# Altium PCB OPAMP_TESTERh.PcbDoc (part 2 of 2)
Units mm, origin at the board's own origin, x right, y up, seen from the top; angles counter-clockwise.
Board outline 262.64 x 156.72 mm, 2 copper layers (Top Layer, Bottom Layer); 210 components, 0 nets, 1610 pads, 0 vias.
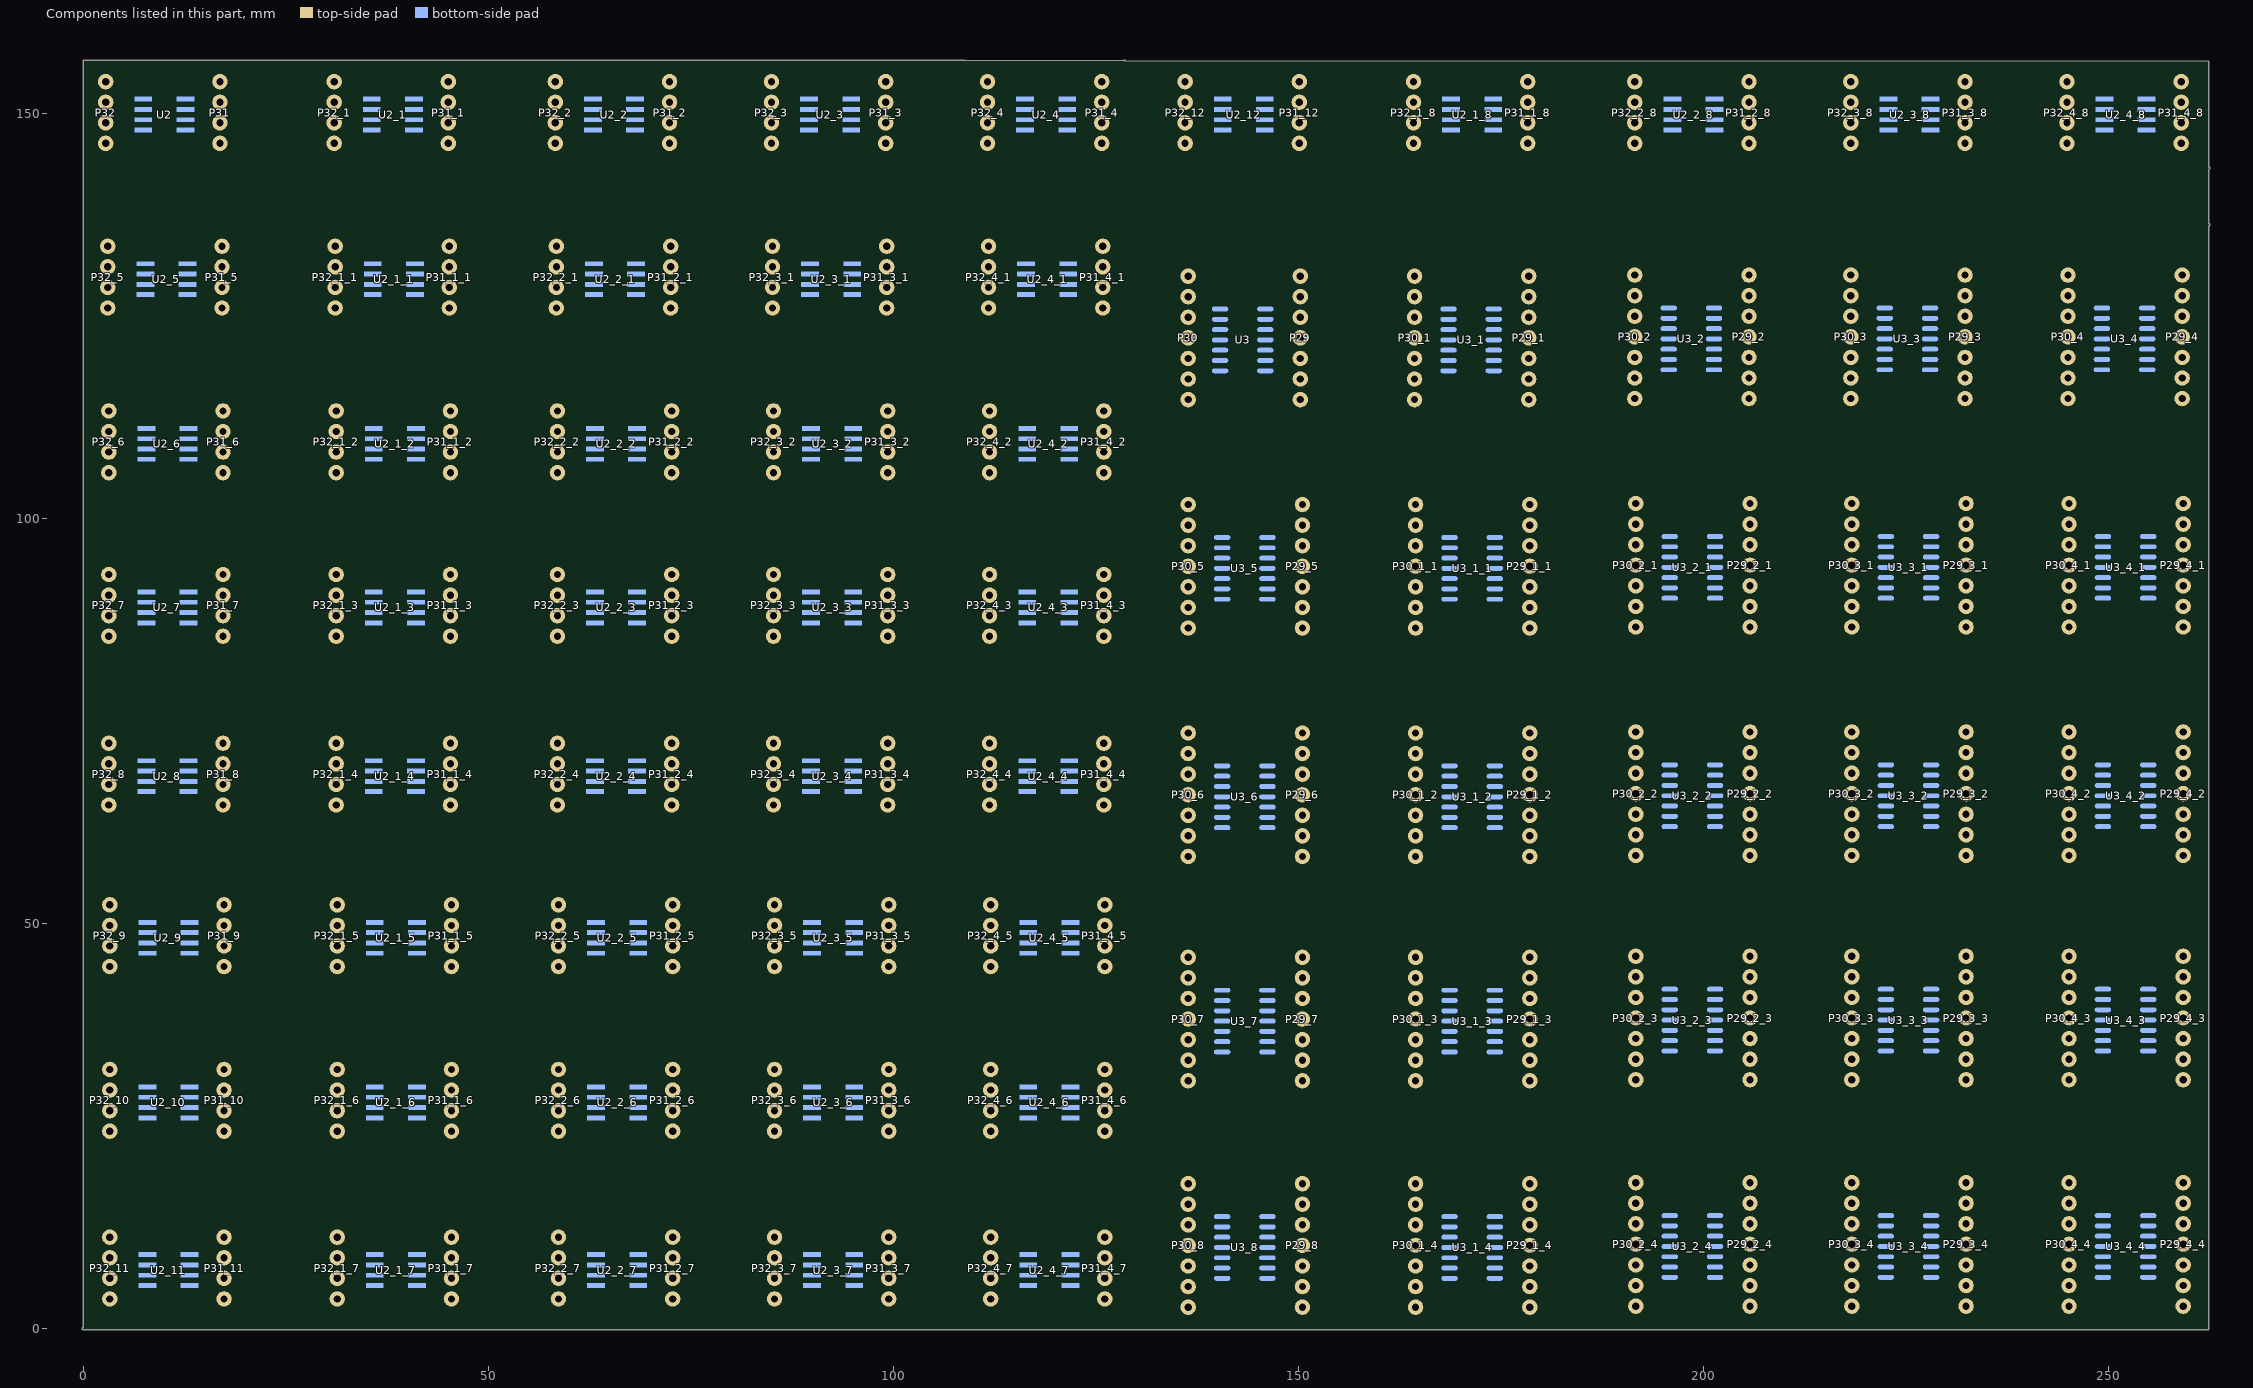
[diagram p2: the components of this part, seen from the top]

## Nets (pads, with @x,y where several pads share a name; then routed paths per layer and width w, separated by ;. In a path a pad name is that pad's centre, name@x,y a point inside that pad or via, vN(x,y) a via of type N, cw(c..) or ccw(c..) an arc to the next point about the centre after c; other vN are vias at no path point) (continued)
copper on no net: | length 3657.5
  Bottom Layer w0.762: 2.794,146.304 4.445,147.955 7.433,147.955 ; 2.794,148.844 3.103,148.844 3.484,149.225 7.433,149.225 ; 2.794,151.384 2.923,151.384 3.812,150.495 7.433,150.495 ; 2.794,153.924 3.013,153.705 3.648,153.705 5.588,151.765 7.433,151.765 ; 3.048,125.984 4.699,127.635 7.687,127.635 ; 3.048,128.524 3.357,128.524 3.738,128.905 7.687,128.905 ; 3.048,131.064 3.177,131.064 4.066,130.175 7.687,130.175 ; 3.048,133.604 3.267,133.385 3.902,133.385 5.842,131.445 7.687,131.445 ; 3.175,64.643 4.826,66.294 7.814,66.294 ; 3.175,67.183 3.484,67.183 3.865,67.564 7.814,67.564 ; 3.175,69.723 3.304,69.723 4.193,68.834 7.814,68.834 ; 3.175,72.263 3.394,72.044 4.029,72.044 5.969,70.104 7.814,70.104 ; 3.175,85.471 4.826,87.122 7.814,87.122 ; 3.175,88.011 3.484,88.011 3.865,88.392 7.814,88.392 ; 3.175,90.551 3.304,90.551 4.193,89.662 7.814,89.662 ; 3.175,93.091 3.394,92.872 4.029,92.872 5.969,90.932 7.814,90.932 ; 3.175,105.664 4.826,107.315 7.814,107.315 ; 3.175,108.204 3.484,108.204 3.865,108.585 7.814,108.585 ; 3.175,110.744 3.304,110.744 4.193,109.855 7.814,109.855 ; 3.175,113.284 3.394,113.065 4.029,113.065 5.969,111.125 7.814,111.125 ; 3.302,3.683 4.953,5.334 7.941,5.334 ; 3.302,6.223 3.611,6.223 3.992,6.604 7.941,6.604 ; 3.302,8.763 3.431,8.763 4.32,7.874 7.941,7.874 ; 3.302,11.303 3.521,11.084 4.156,11.084 6.096,9.144 7.941,9.144 ; 3.302,24.384 4.953,26.035 7.941,26.035 ; 3.302,26.924 3.611,26.924 3.992,27.305 7.941,27.305 ; 3.302,29.464 3.431,29.464 4.32,28.575 7.941,28.575 ; 3.302,32.004 3.521,31.785 4.156,31.785 6.096,29.845 7.941,29.845 ; 3.302,44.704 4.953,46.355 7.941,46.355 ; 3.302,47.244 3.611,47.244 3.992,47.625 7.941,47.625 ; 3.302,49.784 3.431,49.784 4.32,48.895 7.941,48.895 ; 3.302,52.324 3.521,52.105 4.156,52.105 6.096,50.165 7.941,50.165 ; 12.633,147.955 14.859,147.955 16.291,146.523 16.672,146.523 16.891,146.304 ; 12.633,149.225 16.201,149.225 16.582,148.844 16.891,148.844 ; 12.633,150.495 15.693,150.495 16.582,151.384 16.891,151.384 ; 12.633,151.765 14.732,151.765 16.891,153.924 ; 12.887,127.635 15.113,127.635 16.545,126.203 16.926,126.203 17.145,125.984 ; 12.887,128.905 16.455,128.905 16.836,128.524 17.145,128.524 ; 12.887,130.175 15.947,130.175 16.836,131.064 17.145,131.064 ; 12.887,131.445 14.986,131.445 17.145,133.604 ; 13.014,66.294 15.24,66.294 16.672,64.862 17.053,64.862 17.272,64.643 ; 13.014,67.564 16.582,67.564 16.963,67.183 17.272,67.183 ; 13.014,68.834 16.074,68.834 16.963,69.723 17.272,69.723 ; 13.014,70.104 15.113,70.104 17.272,72.263 ; 13.014,87.122 15.24,87.122 16.672,85.69 17.053,85.69 17.272,85.471 ; 13.014,88.392 16.582,88.392 16.963,88.011 17.272,88.011 ; 13.014,89.662 16.074,89.662 16.963,90.551 17.272,90.551 ; 13.014,90.932 15.113,90.932 17.272,93.091 ; 13.014,107.315 15.24,107.315 16.672,105.883 17.053,105.883 17.272,105.664 ; 13.014,108.585 16.582,108.585 16.963,108.204 17.272,108.204 ; 13.014,109.855 16.074,109.855 16.963,110.744 17.272,110.744 ; 13.014,111.125 15.113,111.125 17.272,113.284 ; 13.141,5.334 15.367,5.334 16.799,3.902 17.18,3.902 17.399,3.683 ; 13.141,6.604 16.709,6.604 17.09,6.223 17.399,6.223 ; 13.141,7.874 16.201,7.874 17.09,8.763 17.399,8.763 ; 13.141,9.144 15.24,9.144 17.399,11.303 ; 13.141,26.035 15.367,26.035 16.799,24.603 17.18,24.603 17.399,24.384 ; 13.141,27.305 16.709,27.305 17.09,26.924 17.399,26.924 ; 13.141,28.575 16.201,28.575 17.09,29.464 17.399,29.464 ; 13.141,29.845 15.24,29.845 17.399,32.004 ; 13.141,46.355 15.367,46.355 16.799,44.923 17.18,44.923 17.399,44.704 ; 13.141,47.625 16.709,47.625 17.09,47.244 17.399,47.244 ; 13.141,48.895 16.201,48.895 17.09,49.784 17.399,49.784 ; 13.141,50.165 15.24,50.165 17.399,52.324 ; 30.988,146.304 32.639,147.955 35.627,147.955 ; 30.988,148.844 31.297,148.844 31.678,149.225 35.627,149.225 ; 30.988,151.384 31.117,151.384 32.006,150.495 35.627,150.495 ; 30.988,153.924 31.207,153.705 31.842,153.705 33.782,151.765 35.627,151.765 ; 31.115,125.984 32.766,127.635 35.754,127.635 ; 31.115,128.524 31.424,128.524 31.805,128.905 35.754,128.905 ; 31.115,131.064 31.244,131.064 32.133,130.175 35.754,130.175 ; 31.115,133.604 31.334,133.385 31.969,133.385 33.909,131.445 35.754,131.445 ; 31.242,64.643 32.893,66.294 35.881,66.294 ; 31.242,67.183 31.551,67.183 31.932,67.564 35.881,67.564 ; 31.242,69.723 31.371,69.723 32.26,68.834 35.881,68.834 ; 31.242,72.263 31.461,72.044 32.096,72.044 34.036,70.104 35.881,70.104 ; 31.242,85.471 32.893,87.122 35.881,87.122 ; 31.242,88.011 31.551,88.011 31.932,88.392 35.881,88.392 ; 31.242,90.551 31.371,90.551 32.26,89.662 35.881,89.662 ; 31.242,93.091 31.461,92.872 32.096,92.872 34.036,90.932 35.881,90.932 ; 31.242,105.664 32.893,107.315 35.881,107.315 ; 31.242,108.204 31.551,108.204 31.932,108.585 35.881,108.585 ; 31.242,110.744 31.371,110.744 32.26,109.855 35.881,109.855 ; 31.242,113.284 31.461,113.065 32.096,113.065 34.036,111.125 35.881,111.125 ; 31.369,3.683 33.02,5.334 36.008,5.334 ; 31.369,6.223 31.678,6.223 32.059,6.604 36.008,6.604 ; 31.369,8.763 31.498,8.763 32.387,7.874 36.008,7.874 ; 31.369,11.303 31.588,11.084 32.223,11.084 34.163,9.144 36.008,9.144 ; 31.369,24.384 33.02,26.035 36.008,26.035 ; 31.369,26.924 31.678,26.924 32.059,27.305 36.008,27.305 ; 31.369,29.464 31.498,29.464 32.387,28.575 36.008,28.575 ; 31.369,32.004 31.588,31.785 32.223,31.785 34.163,29.845 36.008,29.845 ; 31.369,44.704 33.02,46.355 36.008,46.355 ; 31.369,47.244 31.678,47.244 32.059,47.625 36.008,47.625 ; 31.369,49.784 31.498,49.784 32.387,48.895 36.008,48.895 ; 31.369,52.324 31.588,52.105 32.223,52.105 34.163,50.165 36.008,50.165 ; 40.827,147.955 43.053,147.955 44.485,146.523 44.866,146.523 45.085,146.304 ; 40.827,149.225 44.395,149.225 44.776,148.844 45.085,148.844 ; 40.827,150.495 43.887,150.495 44.776,151.384 45.085,151.384 ; 40.827,151.765 42.926,151.765 45.085,153.924 ; 40.954,127.635 43.18,127.635 44.612,126.203 44.993,126.203 45.212,125.984 ; 40.954,128.905 44.522,128.905 44.903,128.524 45.212,128.524 ; 40.954,130.175 44.014,130.175 44.903,131.064 45.212,131.064 ; 40.954,131.445 43.053,131.445 45.212,133.604 ; 41.081,66.294 43.307,66.294 44.739,64.862 45.12,64.862 45.339,64.643 ; 41.081,67.564 44.649,67.564 45.03,67.183 45.339,67.183 ; 41.081,68.834 44.141,68.834 45.03,69.723 45.339,69.723 ; 41.081,70.104 43.18,70.104 45.339,72.263 ; 41.081,87.122 43.307,87.122 44.739,85.69 45.12,85.69 45.339,85.471 ; 41.081,88.392 44.649,88.392 45.03,88.011 45.339,88.011 ; 41.081,89.662 44.141,89.662 45.03,90.551 45.339,90.551 ; 41.081,90.932 43.18,90.932 45.339,93.091 ; 41.081,107.315 43.307,107.315 44.739,105.883 45.12,105.883 45.339,105.664 ; 41.081,108.585 44.649,108.585 45.03,108.204 45.339,108.204 ; 41.081,109.855 44.141,109.855 45.03,110.744 45.339,110.744 ; 41.081,111.125 43.18,111.125 45.339,113.284 ; 41.208,5.334 43.434,5.334 44.866,3.902 45.247,3.902 45.466,3.683 ; 41.208,6.604 44.776,6.604 45.157,6.223 45.466,6.223 ; 41.208,7.874 44.268,7.874 45.157,8.763 45.466,8.763 ; 41.208,9.144 43.307,9.144 45.466,11.303 ; 41.208,26.035 43.434,26.035 44.866,24.603 45.247,24.603 45.466,24.384 ; 41.208,27.305 44.776,27.305 45.157,26.924 45.466,26.924 ; 41.208,28.575 44.268,28.575 45.157,29.464 45.466,29.464 ; 41.208,29.845 43.307,29.845 45.466,32.004 ; 41.208,46.355 43.434,46.355 44.866,44.923 45.247,44.923 45.466,44.704 ; 41.208,47.625 44.776,47.625 45.157,47.244 45.466,47.244 ; 41.208,48.895 44.268,48.895 45.157,49.784 45.466,49.784 ; 41.208,50.165 43.307,50.165 45.466,52.324 ; 58.293,146.304 59.944,147.955 62.932,147.955 ; 58.293,148.844 58.602,148.844 58.983,149.225 62.932,149.225 ; 58.293,151.384 58.422,151.384 59.311,150.495 62.932,150.495 ; 58.293,153.924 58.512,153.705 59.147,153.705 61.087,151.765 62.932,151.765 ; 58.42,125.984 60.071,127.635 63.059,127.635 ; 58.42,128.524 58.729,128.524 59.11,128.905 63.059,128.905 ; 58.42,131.064 58.549,131.064 59.438,130.175 63.059,130.175 ; 58.42,133.604 58.639,133.385 59.274,133.385 61.214,131.445 63.059,131.445 ; 58.547,64.643 60.198,66.294 63.186,66.294 ; 58.547,67.183 58.856,67.183 59.237,67.564 63.186,67.564 ; 58.547,69.723 58.676,69.723 59.565,68.834 63.186,68.834 ; 58.547,72.263 58.766,72.044 59.401,72.044 61.341,70.104 63.186,70.104 ; 58.547,85.471 60.198,87.122 63.186,87.122 ; 58.547,88.011 58.856,88.011 59.237,88.392 63.186,88.392 ; 58.547,90.551 58.676,90.551 59.565,89.662 63.186,89.662 ; 58.547,93.091 58.766,92.872 59.401,92.872 61.341,90.932 63.186,90.932 ; 58.547,105.664 60.198,107.315 63.186,107.315 ; 58.547,108.204 58.856,108.204 59.237,108.585 63.186,108.585 ; 58.547,110.744 58.676,110.744 59.565,109.855 63.186,109.855 ; 58.547,113.284 58.766,113.065 59.401,113.065 61.341,111.125 63.186,111.125 ; 58.674,3.683 60.325,5.334 63.313,5.334 ; 58.674,6.223 58.983,6.223 59.364,6.604 63.313,6.604 ; 58.674,8.763 58.803,8.763 59.692,7.874 63.313,7.874 ; 58.674,11.303 58.893,11.084 59.528,11.084 61.468,9.144 63.313,9.144 ; 58.674,24.384 60.325,26.035 63.313,26.035 ; 58.674,26.924 58.983,26.924 59.364,27.305 63.313,27.305 ; 58.674,29.464 58.803,29.464 59.692,28.575 63.313,28.575 ; 58.674,32.004 58.893,31.785 59.528,31.785 61.468,29.845 63.313,29.845 ; 58.674,44.704 60.325,46.355 63.313,46.355 ; 58.674,47.244 58.983,47.244 59.364,47.625 63.313,47.625 ; 58.674,49.784 58.803,49.784 59.692,48.895 63.313,48.895 ; 58.674,52.324 58.893,52.105 59.528,52.105 61.468,50.165 63.313,50.165 ; 68.132,147.955 70.358,147.955 71.79,146.523 72.171,146.523 72.39,146.304 ; 68.132,149.225 71.7,149.225 72.081,148.844 72.39,148.844 ; 68.132,150.495 71.192,150.495 72.081,151.384 72.39,151.384 ; 68.132,151.765 70.231,151.765 72.39,153.924 ; 68.259,127.635 70.485,127.635 71.917,126.203 72.298,126.203 72.517,125.984 ; 68.259,128.905 71.827,128.905 72.208,128.524 72.517,128.524 ; 68.259,130.175 71.319,130.175 72.208,131.064 72.517,131.064 ; 68.259,131.445 70.358,131.445 72.517,133.604 ; 68.386,66.294 70.612,66.294 72.044,64.862 72.425,64.862 72.644,64.643 ; 68.386,67.564 71.954,67.564 72.335,67.183 72.644,67.183 ; 68.386,68.834 71.446,68.834 72.335,69.723 72.644,69.723 ; 68.386,70.104 70.485,70.104 72.644,72.263 ; 68.386,87.122 70.612,87.122 72.044,85.69 72.425,85.69 72.644,85.471 ; 68.386,88.392 71.954,88.392 72.335,88.011 72.644,88.011 ; 68.386,89.662 71.446,89.662 72.335,90.551 72.644,90.551 ; 68.386,90.932 70.485,90.932 72.644,93.091 ; 68.386,107.315 70.612,107.315 72.044,105.883 72.425,105.883 72.644,105.664 ; 68.386,108.585 71.954,108.585 72.335,108.204 72.644,108.204 ; 68.386,109.855 71.446,109.855 72.335,110.744 72.644,110.744 ; 68.386,111.125 70.485,111.125 72.644,113.284 ; 68.513,5.334 70.739,5.334 72.171,3.902 72.552,3.902 72.771,3.683 ; 68.513,6.604 72.081,6.604 72.462,6.223 72.771,6.223 ; 68.513,7.874 71.573,7.874 72.462,8.763 72.771,8.763 ; 68.513,9.144 70.612,9.144 72.771,11.303 ; 68.513,26.035 70.739,26.035 72.171,24.603 72.552,24.603 72.771,24.384 ; 68.513,27.305 72.081,27.305 72.462,26.924 72.771,26.924 ; 68.513,28.575 71.573,28.575 72.462,29.464 72.771,29.464 ; 68.513,29.845 70.612,29.845 72.771,32.004 ; 68.513,46.355 70.739,46.355 72.171,44.923 72.552,44.923 72.771,44.704 ; 68.513,47.625 72.081,47.625 72.462,47.244 72.771,47.244 ; 68.513,48.895 71.573,48.895 72.462,49.784 72.771,49.784 ; 68.513,50.165 70.612,50.165 72.771,52.324 ; 84.963,146.304 86.614,147.955 89.602,147.955 ; 84.963,148.844 85.272,148.844 85.653,149.225 89.602,149.225 ; 84.963,151.384 85.092,151.384 85.981,150.495 89.602,150.495 ; 84.963,153.924 85.182,153.705 85.817,153.705 87.757,151.765 89.602,151.765 ; 85.09,125.984 86.741,127.635 89.729,127.635 ; 85.09,128.524 85.399,128.524 85.78,128.905 89.729,128.905 ; 85.09,131.064 85.219,131.064 86.108,130.175 89.729,130.175 ; 85.09,133.604 85.309,133.385 85.944,133.385 87.884,131.445 89.729,131.445 ; 85.217,64.643 86.868,66.294 89.856,66.294 ; 85.217,67.183 85.526,67.183 85.907,67.564 89.856,67.564 ; 85.217,69.723 85.346,69.723 86.235,68.834 89.856,68.834 ; 85.217,72.263 85.436,72.044 86.071,72.044 88.011,70.104 89.856,70.104 ; 85.217,85.471 86.868,87.122 89.856,87.122 ; 85.217,88.011 85.526,88.011 85.907,88.392 89.856,88.392 ; 85.217,90.551 85.346,90.551 86.235,89.662 89.856,89.662 ; 85.217,93.091 85.436,92.872 86.071,92.872 88.011,90.932 89.856,90.932 ; 85.217,105.664 86.868,107.315 89.856,107.315 ; 85.217,108.204 85.526,108.204 85.907,108.585 89.856,108.585 ; 85.217,110.744 85.346,110.744 86.235,109.855 89.856,109.855 ; 85.217,113.284 85.436,113.065 86.071,113.065 88.011,111.125 89.856,111.125 ; 85.344,3.683 86.995,5.334 89.983,5.334 ; 85.344,6.223 85.653,6.223 86.034,6.604 89.983,6.604 ; 85.344,8.763 85.473,8.763 86.362,7.874 89.983,7.874 ; 85.344,11.303 85.563,11.084 86.198,11.084 88.138,9.144 89.983,9.144 ; 85.344,24.384 86.995,26.035 89.983,26.035 ; 85.344,26.924 85.653,26.924 86.034,27.305 89.983,27.305 ; 85.344,29.464 85.473,29.464 86.362,28.575 89.983,28.575 ; 85.344,32.004 85.563,31.785 86.198,31.785 88.138,29.845 89.983,29.845 ; 85.344,44.704 86.995,46.355 89.983,46.355 ; 85.344,47.244 85.653,47.244 86.034,47.625 89.983,47.625 ; 85.344,49.784 85.473,49.784 86.362,48.895 89.983,48.895 ; 85.344,52.324 85.563,52.105 86.198,52.105 88.138,50.165 89.983,50.165 ; 94.802,147.955 97.028,147.955 98.46,146.523 98.841,146.523 99.06,146.304 ; 94.802,149.225 98.37,149.225 98.751,148.844 99.06,148.844 ; 94.802,150.495 97.862,150.495 98.751,151.384 99.06,151.384 ; 94.802,151.765 96.901,151.765 99.06,153.924 ; 94.929,127.635 97.155,127.635 98.587,126.203 98.968,126.203 99.187,125.984 ; 94.929,128.905 98.497,128.905 98.878,128.524 99.187,128.524 ; 94.929,130.175 97.989,130.175 98.878,131.064 99.187,131.064 ; 94.929,131.445 97.028,131.445 99.187,133.604 ; 95.056,66.294 97.282,66.294 98.714,64.862 99.095,64.862 99.314,64.643 ; 95.056,67.564 98.624,67.564 99.005,67.183 99.314,67.183 ; 95.056,68.834 98.116,68.834 99.005,69.723 99.314,69.723 ; 95.056,70.104 97.155,70.104 99.314,72.263 ; 95.056,87.122 97.282,87.122 98.714,85.69 99.095,85.69 99.314,85.471 ; 95.056,88.392 98.624,88.392 99.005,88.011 99.314,88.011 ; 95.056,89.662 98.116,89.662 99.005,90.551 99.314,90.551 ; 95.056,90.932 97.155,90.932 99.314,93.091 ; 95.056,107.315 97.282,107.315 98.714,105.883 99.095,105.883 99.314,105.664 ; 95.056,108.585 98.624,108.585 99.005,108.204 99.314,108.204 ; 95.056,109.855 98.116,109.855 99.005,110.744 99.314,110.744 ; 95.056,111.125 97.155,111.125 99.314,113.284 ; 95.183,5.334 97.409,5.334 98.841,3.902 99.222,3.902 99.441,3.683 ; 95.183,6.604 98.751,6.604 99.132,6.223 99.441,6.223 ; 95.183,7.874 98.243,7.874 99.132,8.763 99.441,8.763 ; 95.183,9.144 97.282,9.144 99.441,11.303 ; 95.183,26.035 97.409,26.035 98.841,24.603 99.222,24.603 99.441,24.384 ; 95.183,27.305 98.751,27.305 99.132,26.924 99.441,26.924 ; 95.183,28.575 98.243,28.575 99.132,29.464 99.441,29.464 ; 95.183,29.845 97.282,29.845 99.441,32.004 ; 95.183,46.355 97.409,46.355 98.841,44.923 99.222,44.923 99.441,44.704 ; 95.183,47.625 98.751,47.625 99.132,47.244 99.441,47.244 ; 95.183,48.895 98.243,48.895 99.132,49.784 99.441,49.784 ; 95.183,50.165 97.282,50.165 99.441,52.324 ; 111.633,146.304 113.284,147.955 116.272,147.955 ; 111.633,148.844 111.942,148.844 112.323,149.225 116.272,149.225 ; 111.633,151.384 111.762,151.384 112.651,150.495 116.272,150.495 ; 111.633,153.924 111.852,153.705 112.487,153.705 114.427,151.765 116.272,151.765 ; 111.76,125.984 113.411,127.635 116.399,127.635 ; 111.76,128.524 112.069,128.524 112.45,128.905 116.399,128.905 ; 111.76,131.064 111.889,131.064 112.778,130.175 116.399,130.175 ; 111.76,133.604 111.979,133.385 112.614,133.385 114.554,131.445 116.399,131.445 ; 111.887,64.643 113.538,66.294 116.526,66.294 ; 111.887,67.183 112.196,67.183 112.577,67.564 116.526,67.564 ; 111.887,69.723 112.016,69.723 112.905,68.834 116.526,68.834 ; 111.887,72.263 112.106,72.044 112.741,72.044 114.681,70.104 116.526,70.104 ; 111.887,85.471 113.538,87.122 116.526,87.122 ; 111.887,88.011 112.196,88.011 112.577,88.392 116.526,88.392 ; 111.887,90.551 112.016,90.551 112.905,89.662 116.526,89.662 ; 111.887,93.091 112.106,92.872 112.741,92.872 114.681,90.932 116.526,90.932 ; 111.887,105.664 113.538,107.315 116.526,107.315 ; 111.887,108.204 112.196,108.204 112.577,108.585 116.526,108.585 ; 111.887,110.744 112.016,110.744 112.905,109.855 116.526,109.855 ; 111.887,113.284 112.106,113.065 112.741,113.065 114.681,111.125 116.526,111.125 ; 112.014,3.683 113.665,5.334 116.653,5.334 ; 112.014,6.223 112.323,6.223 112.704,6.604 116.653,6.604 ; 112.014,8.763 112.143,8.763 113.032,7.874 116.653,7.874 ; 112.014,11.303 112.233,11.084 112.868,11.084 114.808,9.144 116.653,9.144 ; 112.014,24.384 113.665,26.035 116.653,26.035 ; 112.014,26.924 112.323,26.924 112.704,27.305 116.653,27.305 ; 112.014,29.464 112.143,29.464 113.032,28.575 116.653,28.575 ; 112.014,32.004 112.233,31.785 112.868,31.785 114.808,29.845 116.653,29.845 ; 112.014,44.704 113.665,46.355 116.653,46.355 ; 112.014,47.244 112.323,47.244 112.704,47.625 116.653,47.625 ; 112.014,49.784 112.143,49.784 113.032,48.895 116.653,48.895 ; 112.014,52.324 112.233,52.105 112.868,52.105 114.808,50.165 116.653,50.165 ; 121.472,147.955 123.698,147.955 125.13,146.523 125.511,146.523 125.73,146.304 ; 121.472,149.225 125.04,149.225 125.421,148.844 125.73,148.844 ; 121.472,150.495 124.532,150.495 125.421,151.384 125.73,151.384 ; 121.472,151.765 123.571,151.765 125.73,153.924 ; 121.599,127.635 123.825,127.635 125.257,126.203 125.638,126.203 125.857,125.984 ; 121.599,128.905 125.167,128.905 125.548,128.524 125.857,128.524 ; 121.599,130.175 124.659,130.175 125.548,131.064 125.857,131.064 ; 121.599,131.445 123.698,131.445 125.857,133.604 ; 121.726,66.294 123.952,66.294 125.384,64.862 125.765,64.862 125.984,64.643 ; 121.726,67.564 125.294,67.564 125.675,67.183 125.984,67.183 ; 121.726,68.834 124.786,68.834 125.675,69.723 125.984,69.723 ; 121.726,70.104 123.825,70.104 125.984,72.263 ; 121.726,87.122 123.952,87.122 125.384,85.69 125.765,85.69 125.984,85.471 ; 121.726,88.392 125.294,88.392 125.675,88.011 125.984,88.011 ; 121.726,89.662 124.786,89.662 125.675,90.551 125.984,90.551 ; 121.726,90.932 123.825,90.932 125.984,93.091 ; 121.726,107.315 123.952,107.315 125.384,105.883 125.765,105.883 125.984,105.664 ; 121.726,108.585 125.294,108.585 125.675,108.204 125.984,108.204 ; 121.726,109.855 124.786,109.855 125.675,110.744 125.984,110.744 ; 121.726,111.125 123.825,111.125 125.984,113.284 ; 121.853,5.334 124.079,5.334 125.511,3.902 125.892,3.902 126.111,3.683 ; 121.853,6.604 125.421,6.604 125.802,6.223 126.111,6.223 ; 121.853,7.874 124.913,7.874 125.802,8.763 126.111,8.763 ; 121.853,9.144 123.952,9.144 126.111,11.303 ; 121.853,26.035 124.079,26.035 125.511,24.603 125.892,24.603 126.111,24.384 ; 121.853,27.305 125.421,27.305 125.802,26.924 126.111,26.924 ; 121.853,28.575 124.913,28.575 125.802,29.464 126.111,29.464 ; 121.853,29.845 123.952,29.845 126.111,32.004 ; 121.853,46.355 124.079,46.355 125.511,44.923 125.892,44.923 126.111,44.704 ; 121.853,47.625 125.421,47.625 125.802,47.244 126.111,47.244 ; 121.853,48.895 124.913,48.895 125.802,49.784 126.111,49.784 ; 121.853,50.165 123.952,50.165 126.111,52.324 ; 136.017,146.304 137.668,147.955 140.656,147.955 ; 136.017,148.844 136.326,148.844 136.707,149.225 140.656,149.225 ; 136.017,151.384 136.146,151.384 137.035,150.495 140.656,150.495 ; 136.017,153.924 136.236,153.705 136.871,153.705 138.811,151.765 140.656,151.765 ; 136.144,114.681 136.22,114.681 139.776,118.237 140.335,118.237 ; 136.144,117.221 138.354,119.431 140.259,119.431 140.335,119.507 ; 136.144,119.761 136.453,119.761 137.469,120.777 140.335,120.777 ; 136.144,122.301 138.239,122.301 138.494,122.047 140.335,122.047 ; 136.144,124.841 136.212,124.841 137.736,123.317 140.335,123.317 ; 136.144,127.381 138.962,124.563 140.311,124.563 ; 136.144,129.921 138.303,129.921 140.335,127.889 140.335,125.857 ; 136.398,2.667 136.474,2.667 140.03,6.223 140.589,6.223 ; 136.398,5.207 138.608,7.417 140.513,7.417 140.589,7.493 ; 136.398,7.747 136.707,7.747 137.723,8.763 140.589,8.763 ; 136.398,10.287 138.493,10.287 138.748,10.033 140.589,10.033 ; 136.398,12.827 136.466,12.827 137.99,11.303 140.589,11.303 ; 136.398,15.367 139.216,12.549 140.565,12.549 ; 136.398,17.907 138.557,17.907 140.589,15.875 140.589,13.843 ; 136.398,30.607 136.474,30.607 140.03,34.163 140.589,34.163 ; 136.398,33.147 138.608,35.357 140.513,35.357 140.589,35.433 ; 136.398,35.687 136.707,35.687 137.723,36.703 140.589,36.703 ; 136.398,38.227 138.493,38.227 138.748,37.973 140.589,37.973 ; 136.398,40.767 136.466,40.767 137.99,39.243 140.589,39.243 ; 136.398,43.307 139.216,40.489 140.565,40.489 ; 136.398,45.847 138.557,45.847 140.589,43.815 140.589,41.783 ; 136.398,58.293 136.474,58.293 140.03,61.849 140.589,61.849 ; 136.398,60.833 138.608,63.043 140.513,63.043 140.589,63.119 ; 136.398,63.373 136.707,63.373 137.723,64.389 140.589,64.389 ; 136.398,65.913 138.493,65.913 138.748,65.659 140.589,65.659 ; 136.398,68.453 136.466,68.453 137.99,66.929 140.589,66.929 ; 136.398,70.993 139.216,68.175 140.565,68.175 ; 136.398,73.533 138.557,73.533 140.589,71.501 140.589,69.469 ; 136.398,86.487 136.474,86.487 140.03,90.043 140.589,90.043 ; 136.398,89.027 138.608,91.237 140.513,91.237 140.589,91.313 ; 136.398,91.567 136.707,91.567 137.723,92.583 140.589,92.583 ; 136.398,94.107 138.493,94.107 138.748,93.853 140.589,93.853 ; 136.398,96.647 136.466,96.647 137.99,95.123 140.589,95.123 ; 136.398,99.187 139.216,96.369 140.565,96.369 ; 136.398,101.727 138.557,101.727 140.589,99.695 140.589,97.663 ; 145.856,147.955 148.082,147.955 149.514,146.523 149.895,146.523 150.114,146.304 ; 145.856,149.225 149.424,149.225 149.805,148.844 150.114,148.844 ; 145.856,150.495 148.916,150.495 149.805,151.384 150.114,151.384 ; 145.856,151.765 147.955,151.765 150.114,153.924 ; 145.923,118.237 146.685,118.237 150.241,114.681 ; 145.923,119.473 147.989,119.473 150.241,117.221 ; 145.923,120.777 148.916,120.777 149.932,119.761 150.241,119.761 ; 145.923,122.066 149.696,122.066 149.932,122.301 150.241,122.301 ; 145.923,123.317 148.649,123.317 150.173,124.841 150.241,124.841 ; 145.923,125.857 145.923,127.762 148.082,129.921 150.241,129.921 ; 145.926,124.59 147.45,124.59 150.241,127.381 ; 146.177,6.223 146.939,6.223 150.495,2.667 ; 146.177,7.459 148.243,7.459 150.495,5.207 ; 146.177,8.763 149.17,8.763 150.186,7.747 150.495,7.747 ; 146.177,10.052 149.95,10.052 150.186,10.287 150.495,10.287 ; 146.177,11.303 148.903,11.303 150.427,12.827 150.495,12.827 ; 146.177,13.843 146.177,15.748 148.336,17.907 150.495,17.907 ; 146.177,34.163 146.939,34.163 150.495,30.607 ; 146.177,35.399 148.243,35.399 150.495,33.147 ; 146.177,36.703 149.17,36.703 150.186,35.687 150.495,35.687 ; 146.177,37.992 149.95,37.992 150.186,38.227 150.495,38.227 ; 146.177,39.243 148.903,39.243 150.427,40.767 150.495,40.767 ; 146.177,41.783 146.177,43.688 148.336,45.847 150.495,45.847 ; 146.177,61.849 146.939,61.849 150.495,58.293 ; 146.177,63.085 148.243,63.085 150.495,60.833 ; 146.177,64.389 149.17,64.389 150.186,63.373 150.495,63.373 ; 146.177,65.678 149.95,65.678 150.186,65.913 150.495,65.913 ; 146.177,66.929 148.903,66.929 150.427,68.453 150.495,68.453 ; 146.177,69.469 146.177,71.374 148.336,73.533 150.495,73.533 ; 146.177,90.043 146.939,90.043 150.495,86.487 ; 146.177,91.279 148.243,91.279 150.495,89.027 ; 146.177,92.583 149.17,92.583 150.186,91.567 150.495,91.567 ; 146.177,93.872 149.95,93.872 150.186,94.107 150.495,94.107 ; 146.177,95.123 148.903,95.123 150.427,96.647 150.495,96.647 ; 146.177,97.663 146.177,99.568 148.336,101.727 150.495,101.727 ; 146.18,12.576 147.704,12.576 150.495,15.367 ; 146.18,40.516 147.704,40.516 150.495,43.307 ; 146.18,68.202 147.704,68.202 150.495,70.993 ; 146.18,96.396 147.704,96.396 150.495,99.187 ; 164.211,146.304 165.862,147.955 168.85,147.955 ; 164.211,148.844 164.52,148.844 164.901,149.225 168.85,149.225 ; 164.211,151.384 164.34,151.384 165.229,150.495 168.85,150.495 ; 164.211,153.924 164.43,153.705 165.065,153.705 167.005,151.765 168.85,151.765 ; 164.338,114.681 164.414,114.681 167.97,118.237 168.529,118.237 ; 164.338,117.221 166.548,119.431 168.453,119.431 168.529,119.507 ; 164.338,119.761 164.647,119.761 165.663,120.777 168.529,120.777 ; 164.338,122.301 166.433,122.301 166.688,122.047 168.529,122.047 ; 164.338,124.841 164.406,124.841 165.93,123.317 168.529,123.317 ; 164.338,127.381 167.156,124.563 168.505,124.563 ; 164.338,129.921 166.497,129.921 168.529,127.889 168.529,125.857 ; 164.465,2.667 164.541,2.667 168.097,6.223 168.656,6.223 ; 164.465,5.207 166.675,7.417 168.58,7.417 168.656,7.493 ; 164.465,7.747 164.774,7.747 165.79,8.763 168.656,8.763 ; 164.465,10.287 166.56,10.287 166.815,10.033 168.656,10.033 ; 164.465,12.827 164.533,12.827 166.057,11.303 168.656,11.303 ; 164.465,15.367 167.283,12.549 168.632,12.549 ; 164.465,17.907 166.624,17.907 168.656,15.875 168.656,13.843 ; 164.465,30.607 164.541,30.607 168.097,34.163 168.656,34.163 ; 164.465,33.147 166.675,35.357 168.58,35.357 168.656,35.433 ; 164.465,35.687 164.774,35.687 165.79,36.703 168.656,36.703 ; 164.465,38.227 166.56,38.227 166.815,37.973 168.656,37.973 ; 164.465,40.767 164.533,40.767 166.057,39.243 168.656,39.243 ; 164.465,43.307 167.283,40.489 168.632,40.489 ; 164.465,45.847 166.624,45.847 168.656,43.815 168.656,41.783 ; 164.465,58.293 164.541,58.293 168.097,61.849 168.656,61.849 ; 164.465,60.833 166.675,63.043 168.58,63.043 168.656,63.119 ; 164.465,63.373 164.774,63.373 165.79,64.389 168.656,64.389 ; 164.465,65.913 166.56,65.913 166.815,65.659 168.656,65.659 ; 164.465,68.453 164.533,68.453 166.057,66.929 168.656,66.929 ; 164.465,70.993 167.283,68.175 168.632,68.175 ; 164.465,73.533 166.624,73.533 168.656,71.501 168.656,69.469 ; 164.465,86.487 164.541,86.487 168.097,90.043 168.656,90.043 ; 164.465,89.027 166.675,91.237 168.58,91.237 168.656,91.313 ; 164.465,91.567 164.774,91.567 165.79,92.583 168.656,92.583 ; 164.465,94.107 166.56,94.107 166.815,93.853 168.656,93.853 ; 164.465,96.647 164.533,96.647 166.057,95.123 168.656,95.123 ; 164.465,99.187 167.283,96.369 168.632,96.369 ; 164.465,101.727 166.624,101.727 168.656,99.695 168.656,97.663 ; 174.05,147.955 176.276,147.955 177.708,146.523 178.089,146.523 178.308,146.304 ; 174.05,149.225 177.618,149.225 177.999,148.844 178.308,148.844 ; 174.05,150.495 177.11,150.495 177.999,151.384 178.308,151.384 ; 174.05,151.765 176.149,151.765 178.308,153.924 ; 174.117,118.237 174.879,118.237 178.435,114.681 ; 174.117,119.473 176.183,119.473 178.435,117.221 ; 174.117,120.777 177.11,120.777 178.126,119.761 178.435,119.761 ; 174.117,122.066 177.89,122.066 178.126,122.301 178.435,122.301 ; 174.117,123.317 176.843,123.317 178.367,124.841 178.435,124.841 ; 174.117,125.857 174.117,127.762 176.276,129.921 178.435,129.921 ; 174.12,124.59 175.644,124.59 178.435,127.381 ; 174.244,6.223 175.006,6.223 178.562,2.667 ; 174.244,7.459 176.31,7.459 178.562,5.207 ; 174.244,8.763 177.237,8.763 178.253,7.747 178.562,7.747 ; 174.244,10.052 178.017,10.052 178.253,10.287 178.562,10.287 ; 174.244,11.303 176.97,11.303 178.494,12.827 178.562,12.827 ; 174.244,13.843 174.244,15.748 176.403,17.907 178.562,17.907 ; 174.244,34.163 175.006,34.163 178.562,30.607 ; 174.244,35.399 176.31,35.399 178.562,33.147 ; 174.244,36.703 177.237,36.703 178.253,35.687 178.562,35.687 ; 174.244,37.992 178.017,37.992 178.253,38.227 178.562,38.227 ; 174.244,39.243 176.97,39.243 178.494,40.767 178.562,40.767 ; 174.244,41.783 174.244,43.688 176.403,45.847 178.562,45.847 ; 174.244,61.849 175.006,61.849 178.562,58.293 ; 174.244,63.085 176.31,63.085 178.562,60.833 ; 174.244,64.389 177.237,64.389 178.253,63.373 178.562,63.373 ; 174.244,65.678 178.017,65.678 178.253,65.913 178.562,65.913 ; 174.244,66.929 176.97,66.929 178.494,68.453 178.562,68.453 ; 174.244,69.469 174.244,71.374 176.403,73.533 178.562,73.533 ; 174.244,90.043 175.006,90.043 178.562,86.487 ; 174.244,91.279 176.31,91.279 178.562,89.027 ; 174.244,92.583 177.237,92.583 178.253,91.567 178.562,91.567 ; 174.244,93.872 178.017,93.872 178.253,94.107 178.562,94.107 ; 174.244,95.123 176.97,95.123 178.494,96.647 178.562,96.647 ; 174.244,97.663 174.244,99.568 176.403,101.727 178.562,101.727 ; 174.247,12.576 175.771,12.576 178.562,15.367 ; 174.247,40.516 175.771,40.516 178.562,43.307 ; 174.247,68.202 175.771,68.202 178.562,70.993 ; 174.247,96.396 175.771,96.396 178.562,99.187 ; 191.516,114.808 191.592,114.808 195.148,118.364 195.707,118.364 ; 191.516,117.348 193.726,119.558 195.631,119.558 195.707,119.634 ; 191.516,119.888 191.825,119.888 192.841,120.904 195.707,120.904 ; 191.516,122.428 193.611,122.428 193.866,122.174 195.707,122.174 ; 191.516,124.968 191.584,124.968 193.108,123.444 195.707,123.444 ; 191.516,127.508 194.334,124.69 195.683,124.69 ; 191.516,130.048 193.675,130.048 195.707,128.016 195.707,125.984 ; 191.516,146.304 193.167,147.955 196.155,147.955 ; 191.516,148.844 191.825,148.844 192.206,149.225 196.155,149.225 ; 191.516,151.384 191.645,151.384 192.534,150.495 196.155,150.495 ; 191.516,153.924 191.735,153.705 192.37,153.705 194.31,151.765 196.155,151.765 ; 191.643,2.794 191.719,2.794 195.275,6.35 195.834,6.35 ; 191.643,5.334 193.853,7.544 195.758,7.544 195.834,7.62 ; 191.643,7.874 191.952,7.874 192.968,8.89 195.834,8.89 ; 191.643,10.414 193.738,10.414 193.993,10.16 195.834,10.16 ; 191.643,12.954 191.711,12.954 193.235,11.43 195.834,11.43 ; 191.643,15.494 194.461,12.676 195.81,12.676 ; 191.643,18.034 193.802,18.034 195.834,16.002 195.834,13.97 ; 191.643,30.734 191.719,30.734 195.275,34.29 195.834,34.29 ; 191.643,33.274 193.853,35.484 195.758,35.484 195.834,35.56 ; 191.643,35.814 191.952,35.814 192.968,36.83 195.834,36.83 ; 191.643,38.354 193.738,38.354 193.993,38.1 195.834,38.1 ; 191.643,40.894 191.711,40.894 193.235,39.37 195.834,39.37 ; 191.643,43.434 194.461,40.616 195.81,40.616 ; 191.643,45.974 193.802,45.974 195.834,43.942 195.834,41.91 ; 191.643,58.42 191.719,58.42 195.275,61.976 195.834,61.976 ; 191.643,60.96 193.853,63.17 195.758,63.17 195.834,63.246 ; 191.643,63.5 191.952,63.5 192.968,64.516 195.834,64.516 ; 191.643,66.04 193.738,66.04 193.993,65.786 195.834,65.786 ; 191.643,68.58 191.711,68.58 193.235,67.056 195.834,67.056 ; 191.643,71.12 194.461,68.302 195.81,68.302 ; 191.643,73.66 193.802,73.66 195.834,71.628 195.834,69.596 ; 191.643,86.614 191.719,86.614 195.275,90.17 195.834,90.17 ; 191.643,89.154 193.853,91.364 195.758,91.364 195.834,91.44 ; 191.643,91.694 191.952,91.694 192.968,92.71 195.834,92.71 ; 191.643,94.234 193.738,94.234 193.993,93.98 195.834,93.98 ; 191.643,96.774 191.711,96.774 193.235,95.25 195.834,95.25 ; 191.643,99.314 194.461,96.496 195.81,96.496 ; 191.643,101.854 193.802,101.854 195.834,99.822 195.834,97.79 ; 201.295,118.364 202.057,118.364 205.613,114.808 ; 201.295,119.6 203.361,119.6 205.613,117.348 ; 201.295,120.904 204.288,120.904 205.304,119.888 205.613,119.888 ; 201.295,122.193 205.068,122.193 205.304,122.428 205.613,122.428 ; 201.295,123.444 204.021,123.444 205.545,124.968 205.613,124.968 ; 201.295,125.984 201.295,127.889 203.454,130.048 205.613,130.048 ; 201.298,124.717 202.822,124.717 205.613,127.508 ; 201.355,147.955 203.581,147.955 205.013,146.523 205.394,146.523 205.613,146.304 ; 201.355,149.225 204.923,149.225 205.304,148.844 205.613,148.844 ; 201.355,150.495 204.415,150.495 205.304,151.384 205.613,151.384 ; 201.355,151.765 203.454,151.765 205.613,153.924 ; 201.422,6.35 202.184,6.35 205.74,2.794 ; 201.422,7.586 203.488,7.586 205.74,5.334 ; 201.422,8.89 204.415,8.89 205.431,7.874 205.74,7.874 ; 201.422,10.179 205.195,10.179 205.431,10.414 205.74,10.414 ; 201.422,11.43 204.148,11.43 205.672,12.954 205.74,12.954 ; 201.422,13.97 201.422,15.875 203.581,18.034 205.74,18.034 ; 201.422,34.29 202.184,34.29 205.74,30.734 ; 201.422,35.526 203.488,35.526 205.74,33.274 ; 201.422,36.83 204.415,36.83 205.431,35.814 205.74,35.814 ; 201.422,38.119 205.195,38.119 205.431,38.354 205.74,38.354 ; 201.422,39.37 204.148,39.37 205.672,40.894 205.74,40.894 ; 201.422,41.91 201.422,43.815 203.581,45.974 205.74,45.974 ; 201.422,61.976 202.184,61.976 205.74,58.42 ; 201.422,63.212 203.488,63.212 205.74,60.96 ; 201.422,64.516 204.415,64.516 205.431,63.5 205.74,63.5 ; 201.422,65.805 205.195,65.805 205.431,66.04 205.74,66.04 ; 201.422,67.056 204.148,67.056 205.672,68.58 205.74,68.58 ; 201.422,69.596 201.422,71.501 203.581,73.66 205.74,73.66 ; 201.422,90.17 202.184,90.17 205.74,86.614 ; 201.422,91.406 203.488,91.406 205.74,89.154 ; 201.422,92.71 204.415,92.71 205.431,91.694 205.74,91.694 ; 201.422,93.999 205.195,93.999 205.431,94.234 205.74,94.234 ; 201.422,95.25 204.148,95.25 205.672,96.774 205.74,96.774 ; 201.422,97.79 201.422,99.695 203.581,101.854 205.74,101.854 ; 201.425,12.703 202.949,12.703 205.74,15.494 ; 201.425,40.643 202.949,40.643 205.74,43.434 ; 201.425,68.329 202.949,68.329 205.74,71.12 ; 201.425,96.523 202.949,96.523 205.74,99.314 ; 218.186,114.808 218.262,114.808 221.818,118.364 222.377,118.364 ; 218.186,117.348 220.396,119.558 222.301,119.558 222.377,119.634 ; 218.186,119.888 218.495,119.888 219.511,120.904 222.377,120.904 ; 218.186,122.428 220.281,122.428 220.536,122.174 222.377,122.174 ; 218.186,124.968 218.254,124.968 219.778,123.444 222.377,123.444 ; 218.186,127.508 221.004,124.69 222.353,124.69 ; 218.186,130.048 220.345,130.048 222.377,128.016 222.377,125.984 ; 218.186,146.304 219.837,147.955 222.825,147.955 ; 218.186,148.844 218.495,148.844 218.876,149.225 222.825,149.225 ; 218.186,151.384 218.315,151.384 219.204,150.495 222.825,150.495 ; 218.186,153.924 218.405,153.705 219.04,153.705 220.98,151.765 222.825,151.765 ; 218.313,2.794 218.389,2.794 221.945,6.35 222.504,6.35 ; 218.313,5.334 220.523,7.544 222.428,7.544 222.504,7.62 ; 218.313,7.874 218.622,7.874 219.638,8.89 222.504,8.89 ; 218.313,10.414 220.409,10.414 220.663,10.16 222.504,10.16 ; 218.313,12.954 218.381,12.954 219.905,11.43 222.504,11.43 ; 218.313,15.494 221.131,12.676 222.48,12.676 ; 218.313,18.034 220.472,18.034 222.504,16.002 222.504,13.97 ; 218.313,30.734 218.389,30.734 221.945,34.29 222.504,34.29 ; 218.313,33.274 220.523,35.484 222.428,35.484 222.504,35.56 ; 218.313,35.814 218.622,35.814 219.638,36.83 222.504,36.83 ; 218.313,38.354 220.409,38.354 220.663,38.1 222.504,38.1 ; 218.313,40.894 218.381,40.894 219.905,39.37 222.504,39.37 ; 218.313,43.434 221.131,40.616 222.48,40.616 ; 218.313,45.974 220.472,45.974 222.504,43.942 222.504,41.91 ; 218.313,58.42 218.389,58.42 221.945,61.976 222.504,61.976 ; 218.313,60.96 220.523,63.17 222.428,63.17 222.504,63.246 ; 218.313,63.5 218.622,63.5 219.638,64.516 222.504,64.516 ; 218.313,66.04 220.409,66.04 220.663,65.786 222.504,65.786 ; 218.313,68.58 218.381,68.58 219.905,67.056 222.504,67.056 ; 218.313,71.12 221.131,68.302 222.48,68.302 ; 218.313,73.66 220.472,73.66 222.504,71.628 222.504,69.596 ; 218.313,86.614 218.389,86.614 221.945,90.17 222.504,90.17 ; 218.313,89.154 220.523,91.364 222.428,91.364 222.504,91.44 ; 218.313,91.694 218.622,91.694 219.638,92.71 222.504,92.71 ; 218.313,94.234 220.409,94.234 220.663,93.98 222.504,93.98 ; 218.313,96.774 218.381,96.774 219.905,95.25 222.504,95.25 ; 218.313,99.314 221.131,96.496 222.48,96.496 ; 218.313,101.854 220.472,101.854 222.504,99.822 222.504,97.79 ; 227.965,118.364 228.727,118.364 232.283,114.808 ; 227.965,119.6 230.031,119.6 232.283,117.348 ; 227.965,120.904 230.958,120.904 231.974,119.888 232.283,119.888 ; 227.965,122.193 231.738,122.193 231.974,122.428 232.283,122.428 ; 227.965,123.444 230.691,123.444 232.215,124.968 232.283,124.968 ; 227.965,125.984 227.965,127.889 230.124,130.048 232.283,130.048 ; 227.968,124.717 229.492,124.717 232.283,127.508 ; 228.025,147.955 230.251,147.955 231.683,146.523 232.064,146.523 232.283,146.304 ; 228.025,149.225 231.593,149.225 231.974,148.844 232.283,148.844 ; 228.025,150.495 231.085,150.495 231.974,151.384 232.283,151.384 ; 228.025,151.765 230.124,151.765 232.283,153.924 ; 228.092,6.35 228.854,6.35 232.41,2.794 ; 228.092,7.586 230.158,7.586 232.41,5.334 ; 228.092,8.89 231.085,8.89 232.101,7.874 232.41,7.874 ; 228.092,10.179 231.865,10.179 232.101,10.414 232.41,10.414 ; 228.092,11.43 230.818,11.43 232.342,12.954 232.41,12.954 ; 228.092,13.97 228.092,15.875 230.251,18.034 232.41,18.034 ; 228.092,34.29 228.854,34.29 232.41,30.734 ; 228.092,35.526 230.158,35.526 232.41,33.274 ; 228.092,36.83 231.085,36.83 232.101,35.814 232.41,35.814 ; 228.092,38.119 231.865,38.119 232.101,38.354 232.41,38.354 ; 228.092,39.37 230.818,39.37 232.342,40.894 232.41,40.894 ; 228.092,41.91 228.092,43.815 230.251,45.974 232.41,45.974 ; 228.092,61.976 228.854,61.976 232.41,58.42 ; 228.092,63.212 230.158,63.212 232.41,60.96 ; 228.092,64.516 231.085,64.516 232.101,63.5 232.41,63.5 ; 228.092,65.805 231.865,65.805 232.101,66.04 232.41,66.04 ; 228.092,67.056 230.818,67.056 232.342,68.58 232.41,68.58 ; 228.092,69.596 228.092,71.501 230.251,73.66 232.41,73.66 ; 228.092,90.17 228.854,90.17 232.41,86.614 ; 228.092,91.406 230.158,91.406 232.41,89.154 ; 228.092,92.71 231.085,92.71 232.101,91.694 232.41,91.694 ; 228.092,93.999 231.865,93.999 232.101,94.234 232.41,94.234 ; 228.092,95.25 230.818,95.25 232.342,96.774 232.41,96.774 ; 228.092,97.79 228.092,99.695 230.251,101.854 232.41,101.854 ; 228.095,12.703 229.619,12.703 232.41,15.494 ; 228.095,40.643 229.619,40.643 232.41,43.434 ; 228.095,68.329 229.619,68.329 232.41,71.12 ; 228.095,96.523 229.619,96.523 232.41,99.314 ; 244.856,146.304 246.507,147.955 249.495,147.955 ; 244.856,148.844 245.165,148.844 245.546,149.225 249.495,149.225 ; 244.856,151.384 244.985,151.384 245.874,150.495 249.495,150.495 ; 244.856,153.924 245.075,153.705 245.71,153.705 247.65,151.765 249.495,151.765 ; 244.983,114.808 245.059,114.808 248.615,118.364 249.174,118.364 ; 244.983,117.348 247.193,119.558 249.098,119.558 249.174,119.634 ; 244.983,119.888 245.292,119.888 246.308,120.904 249.174,120.904 ; 244.983,122.428 247.078,122.428 247.333,122.174 249.174,122.174 ; 244.983,124.968 245.051,124.968 246.575,123.444 249.174,123.444 ; 244.983,127.508 247.801,124.69 249.15,124.69 ; 244.983,130.048 247.142,130.048 249.174,128.016 249.174,125.984 ; 245.11,2.794 245.186,2.794 248.742,6.35 249.301,6.35 ; 245.11,5.334 247.32,7.544 249.225,7.544 249.301,7.62 ; 245.11,7.874 245.419,7.874 246.435,8.89 249.301,8.89 ; 245.11,10.414 247.206,10.414 247.46,10.16 249.301,10.16 ; 245.11,12.954 245.178,12.954 246.702,11.43 249.301,11.43 ; 245.11,15.494 247.928,12.676 249.277,12.676 ; 245.11,18.034 247.269,18.034 249.301,16.002 249.301,13.97 ; 245.11,30.734 245.186,30.734 248.742,34.29 249.301,34.29 ; 245.11,33.274 247.32,35.484 249.225,35.484 249.301,35.56 ; 245.11,35.814 245.419,35.814 246.435,36.83 249.301,36.83 ; 245.11,38.354 247.206,38.354 247.46,38.1 249.301,38.1 ; 245.11,40.894 245.178,40.894 246.702,39.37 249.301,39.37 ; 245.11,43.434 247.928,40.616 249.277,40.616 ; 245.11,45.974 247.269,45.974 249.301,43.942 249.301,41.91 ; 245.11,58.42 245.186,58.42 248.742,61.976 249.301,61.976 ; 245.11,60.96 247.32,63.17 249.225,63.17 249.301,63.246 ; 245.11,63.5 245.419,63.5 246.435,64.516 249.301,64.516 ; 245.11,66.04 247.206,66.04 247.46,65.786 249.301,65.786 ; 245.11,68.58 245.178,68.58 246.702,67.056 249.301,67.056 ; 245.11,71.12 247.928,68.302 249.277,68.302 ; 245.11,73.66 247.269,73.66 249.301,71.628 249.301,69.596 ; 245.11,86.614 245.186,86.614 248.742,90.17 249.301,90.17 ; 245.11,89.154 247.32,91.364 249.225,91.364 249.301,91.44 ; 245.11,91.694 245.419,91.694 246.435,92.71 249.301,92.71 ; 245.11,94.234 247.206,94.234 247.46,93.98 249.301,93.98 ; 245.11,96.774 245.178,96.774 246.702,95.25 249.301,95.25 ; 245.11,99.314 247.928,96.496 249.277,96.496 ; 245.11,101.854 247.269,101.854 249.301,99.822 249.301,97.79 ; 254.695,147.955 256.921,147.955 258.353,146.523 258.734,146.523 258.953,146.304 ; 254.695,149.225 258.263,149.225 258.644,148.844 258.953,148.844 ; 254.695,150.495 257.755,150.495 258.644,151.384 258.953,151.384 ; 254.695,151.765 256.794,151.765 258.953,153.924 ; 254.762,118.364 255.524,118.364 259.08,114.808 ; 254.762,119.6 256.828,119.6 259.08,117.348 ; 254.762,120.904 257.755,120.904 258.771,119.888 259.08,119.888 ; 254.762,122.193 258.535,122.193 258.771,122.428 259.08,122.428 ; 254.762,123.444 257.488,123.444 259.012,124.968 259.08,124.968 ; 254.762,125.984 254.762,127.889 256.921,130.048 259.08,130.048 ; 254.765,124.717 256.289,124.717 259.08,127.508 ; 254.889,6.35 255.651,6.35 259.207,2.794 ; 254.889,7.586 256.955,7.586 259.207,5.334 ; 254.889,8.89 257.882,8.89 258.898,7.874 259.207,7.874 ; 254.889,10.179 258.662,10.179 258.898,10.414 259.207,10.414 ; 254.889,11.43 257.615,11.43 259.139,12.954 259.207,12.954 ; 254.889,13.97 254.889,15.875 257.048,18.034 259.207,18.034 ; 254.889,34.29 255.651,34.29 259.207,30.734 ; 254.889,35.526 256.955,35.526 259.207,33.274 ; 254.889,36.83 257.882,36.83 258.898,35.814 259.207,35.814 ; 254.889,38.119 258.662,38.119 258.898,38.354 259.207,38.354 ; 254.889,39.37 257.615,39.37 259.139,40.894 259.207,40.894 ; 254.889,41.91 254.889,43.815 257.048,45.974 259.207,45.974 ; 254.889,61.976 255.651,61.976 259.207,58.42 ; 254.889,63.212 256.955,63.212 259.207,60.96 ; 254.889,64.516 257.882,64.516 258.898,63.5 259.207,63.5 ; 254.889,65.805 258.662,65.805 258.898,66.04 259.207,66.04 ; 254.889,67.056 257.615,67.056 259.139,68.58 259.207,68.58 ; 254.889,69.596 254.889,71.501 257.048,73.66 259.207,73.66 ; 254.889,90.17 255.651,90.17 259.207,86.614 ; 254.889,91.406 256.955,91.406 259.207,89.154 ; 254.889,92.71 257.882,92.71 258.898,91.694 259.207,91.694 ; 254.889,93.999 258.662,93.999 258.898,94.234 259.207,94.234 ; 254.889,95.25 257.615,95.25 259.139,96.774 259.207,96.774 ; 254.889,97.79 254.889,99.695 257.048,101.854 259.207,101.854 ; 254.892,12.703 256.416,12.703 259.207,15.494 ; 254.892,40.643 256.416,40.643 259.207,43.434 ; 254.892,68.329 256.416,68.329 259.207,71.12 ; 254.892,96.523 256.416,96.523 259.207,99.314

## Keep-outs
Keep-Out Layer:
  lines w0.254: 0,0 262.255,0 262.255,156.337 0.127,156.464 0.127,0.127 ; 0.127,14.351 128.524,14.351 ; 0.127,21.336 128.524,21.336 ; 0.127,34.671 128.524,34.671 ; 0.127,41.656 128.524,41.656 ; 0.127,54.991 128.524,54.991 ; 0.127,61.976 128.524,61.976 ; 0.127,75.311 128.524,75.311 ; 0.127,82.296 128.524,82.296 ; 0.127,95.631 128.524,95.631 ; 0.127,102.616 128.524,102.616 ; 0.127,115.951 128.524,115.951 ; 0.127,122.936 128.524,122.936 ; 0.127,136.271 262.382,136.271 ; 0.127,143.256 262.382,143.256 ; 20.32,0.127 20.32,156.464 ; 27.94,0.127 27.94,156.464 ; 48.26,0.127 48.26,156.464 ; 54.61,0.127 54.61,156.464 ; 75.692,0.127 75.692,156.464 ; 82.169,0.127 82.169,156.464 ; 102.108,0.127 102.108,156.464 ; 108.712,0.127 108.712,156.464 ; 128.524,0.127 128.524,156.464 ; 133.858,0 133.858,156.337 ; 133.858,20.955 262.255,20.955 ; 133.858,27.559 262.255,27.559 ; 133.858,48.641 262.255,48.641 ; 133.858,55.245 262.255,55.245 ; 133.858,76.327 262.255,76.327 ; 133.858,82.931 262.255,82.931 ; 133.858,105.537 262.255,105.537 ; 133.858,112.141 262.255,112.141 ; 154.178,0 154.178,156.337 ; 161.798,0 161.798,156.337 ; 182.118,0 182.118,156.337 ; 188.468,0 188.468,156.337 ; 209.55,0 209.55,156.337 ; 216.027,0 216.027,156.337 ; 235.966,0 235.966,156.337 ; 242.57,0 242.57,156.337